# EAGLE board UPS-MAF-APU (EAGLE 9.3.0)

Size 65 x 30 mm. Coordinates in mm from the lower left corner, seen from the top.
Outline: 0,3.5 arc90 3.5,0 61.5,0 arc90 65,3.5 65,26.5 arc90 61.5,30 3.5,30 arc90 0,26.5 0,3.5
Copper layers (1*16): Top 0.035559375mm / dielectric 1.6mm / Bottom 0.035559375mm
Design rules "oshpark-2layer": minimum track width 6mil, minimum drill 10mil, track to track 6mil, track to pad 6mil, pad to pad 6mil, via to via 6mil, smd to smd 6mil, copper to edge 15mil, drill to drill 6mil, minimum pad ring 5mil, minimum via ring 5mil, stop-mask expansion 2.5mil, vias tented up to drill 0mil, thermal gap 10mil
Holes 2.75 mm at 3.5,3.5 61.5,3.5 61.5,26.5 3.5,26.5
bKeepout: area 0.4,0.4 to 6.6,6.6; area 0.4,23.4 to 6.6,29.6; area 58.4,23.4 to 64.6,29.6; area 58.4,0.4 to 64.6,6.6
tRestrict: area 0.4,0.4 to 6.6,6.6; area 0.4,23.4 to 6.6,29.6; area 58.4,23.4 to 64.6,29.6; area 58.4,0.4 to 64.6,6.6

## Footprints (pad centres in the part's own frame; a part is rotated, then mirrored left to right if it is on the bottom)
2X20 = drill 1.016 square: 1 -24.13,-1.27 | drill 1.016 octagon: 2 -24.13,1.27; 3 -21.59,-1.27; 4 -21.59,1.27; 5 -19.05,-1.27; 6 -19.05,1.27; 7 -16.51,-1.27; 8 -16.51,1.27; 9 -13.97,-1.27; 10 -13.97,1.27; 11 -11.43,-1.27; 12 -11.43,1.27; 13 -8.89,-1.27; 14 -8.89,1.27; 15 -6.35,-1.27; 16 -6.35,1.27; 17 -3.81,-1.27; 18 -3.81,1.27; 19 -1.27,-1.27; 20 -1.27,1.27; 21 1.27,-1.27; 22 1.27,1.27; 23 3.81,-1.27; 24 3.81,1.27; 25 6.35,-1.27; 26 6.35,1.27; 27 8.89,-1.27; 28 8.89,1.27; 29 11.43,-1.27; 30 11.43,1.27; 31 13.97,-1.27; 32 13.97,1.27; 33 16.51,-1.27; 34 16.51,1.27; 35 19.05,-1.27; 36 19.05,1.27; 37 21.59,-1.27; 38 21.59,1.27; 39 24.13,-1.27; 40 24.13,1.27
PJ-102AH = drill 1.9 pad 3: 1 4.3,-3; 2 4.3,3; 3 -0.4,0
ESQ-104-XX-X-S = drill 1.016 pad 1.524 square: 1 -3.81,0 | drill 1.016 pad 1.524: 2 -1.27,0; 3 1.27,0; 4 3.81,0
S4B-PH-SM4-TB = smd 1 x 3.5: 1 6,0; 2 4,0; 3 2,0; 4 0,0 | smd 1.6 x 3.5: 5 -2.4,5.7; 6 8.4,5.7
MOLEX_70553-0002 = drill 1.09 pad 1.64 square: 1 2.54,6.095 | drill 1.09 pad 1.64: 2 0,6.095; 3 -2.54,6.095
ESQ-106-XX-X-S = drill 1.016 pad 1.524 square: 1 0,0 | drill 1.016 pad 1.524: 2 2.54,0; 3 5.08,0; 4 7.62,0; 5 10.16,0; 6 12.7,0
WIZNET_RB1-125BAG1A = drill 0.9: L1 6.325,-3.38; L2 3.784,-4.899; L3 -3.786,-3.379; L4 -6.325,-4.9 | drill 0.9 pad 1.3 square: R1 -4.446,6.349 | drill 0.9 pad 1.3: R2 -3.176,8.889; R3 -1.906,6.349; R4 -0.636,8.889; R5 0.634,6.349; R6 1.904,8.889; R7 3.174,6.349; R8 4.444,8.889 | drill 1.6 pad 2.184: S1 -7.876,3.049; S2 7.874,3.049 | hole 3.3: 5.714,-0.001; -5.716,-0.001
SON100P300X300X80-7N = smd 0.85 x 0.45: 1 -1.45,1; 2 -1.45,0; 3 -1.45,-1; 4 1.45,-1; 5 1.45,0; 6 1.45,1 | smd 1.6 x 2.5: 7 0,0
SOP65P640X120-8N = smd 1.475 x 0.45: 1 -2.938,0.975; 2 -2.938,0.325; 3 -2.938,-0.325; 4 -2.938,-0.975; 5 2.938,-0.975; 6 2.938,-0.325; 7 2.938,0.325; 8 2.938,0.975
SOP65P640X120-16N = smd 1.475 x 0.45: 1 -2.938,2.275; 2 -2.938,1.625; 3 -2.938,0.975; 4 -2.938,0.325; 5 -2.938,-0.325; 6 -2.938,-0.975; 7 -2.938,-1.625; 8 -2.938,-2.275; 9 2.938,-2.275; 10 2.938,-1.625; 11 2.938,-0.975; 12 2.938,-0.325; 13 2.938,0.325; 14 2.938,0.975; 15 2.938,1.625; 16 2.938,2.275
SOIC127P600X175-8N = smd 1.525 x 0.7: 1 -2.712,1.905; 2 -2.712,0.635; 3 -2.712,-0.635; 4 -2.712,-1.905; 5 2.712,-1.905; 6 2.712,-0.635; 7 2.712,0.635; 8 2.712,1.905
SOP65P780X200-28N = smd 1.8 x 0.45: 1 -3.55,4.225; 2 -3.55,3.575; 3 -3.55,2.925; 4 -3.55,2.275; 5 -3.55,1.625; 6 -3.55,0.975; 7 -3.55,0.325; 8 -3.55,-0.325; 9 -3.55,-0.975; 10 -3.55,-1.625; 11 -3.55,-2.275; 12 -3.55,-2.925; 13 -3.55,-3.575; 14 -3.55,-4.225; 15 3.55,-4.225; 16 3.55,-3.575; 17 3.55,-2.925; 18 3.55,-2.275; 19 3.55,-1.625; 20 3.55,-0.975; 21 3.55,-0.325; 22 3.55,0.325; 23 3.55,0.975; 24 3.55,1.625; 25 3.55,2.275; 26 3.55,2.925; 27 3.55,3.575; 28 3.55,4.225
OKI-78SR-HORIZONTAL = drill 0.835 pad 1.252: 1 2.5,-6.95; 2 0,-6.95; 3 -2.5,-6.95
ECS250203XENTR = smd 3.5 x 1.2: 1 -2.75,0; 2 2.75,0

## Placement (x,y rotation side)
J1  CONNECTOR_PI_40_PIN  [2X20]  32.5,26.5 0 top
J2  Barrel DC In  [PJ-102AH]  -32,-5 0 top  (outside the outline)
J3  OLED  [ESQ-104-XX-X-S]  50.28,15 270 top
J4  VE.Direct Serial  [S4B-PH-SM4-TB]  -51.5,-38 0 top  (outside the outline)
J5  External DS18B20 Temp  [MOLEX_70553-0002]  -49.5,-23 0 top  (outside the outline)
J6  FTDI Serial Console  [ESQ-106-XX-X-S]  -67.5,-46 0 top  (outside the outline)
J7  MagJack  [WIZNET_RB1-125BAG1A]  -83.5,-65.5 0 top  (outside the outline)
U1  OLED_I2C  [OLED-I2C]  32.5,15 180 top
U2  SI7006-A20-IM  [SON100P300X300X80-7N]  -30,-12.5 0 top  (outside the outline)
U3  HAT EEPROM  [SOP65P640X120-8N]  4,-2.5 0 top
U4  INA260AIPW  [SOP65P640X120-16N]  0,-7.5 0 top  (outside the outline)
U5  Isolator  [SOIC127P600X175-8N]  -32.5,-17.5 0 top  (outside the outline)
U6  ENC28J60_SS  [SOP65P780X200-28N]  -65,-35 0 top  (outside the outline)
U7  5V SMPS  [OKI-78SR-HORIZONTAL]  -11.5,-2 0 top  (outside the outline)
Y1  ECS-250-20-3X-EN-TR  [ECS250203XENTR]  -87.5,-79.5 0 top  (outside the outline)

## Library data of the parts
J1 J3 J5 J6 U1 = APU_ENGR480_UPS_EAGLE_Library
J2 = APU_ENGR480_UPS_EAGLE_Library; DESCRIPTION: DC POWER JACK; HEIGHT: mm; MANUFACTURER_NAME: CUI; MANUFACTURER_PART_NUMBER: PJ-102AH; MOUSER_PART_NUMBER: 490-PJ-102AH; MOUSER_PRICE-STOCK: https://www.mouser.com/Search/Refine.aspx?Keyword=490-PJ-102AH
J4 = APU_ENGR480_UPS_EAGLE_Library; DESCRIPTION: PH SMT side entry shroud header 4 way JST PH Series, 2mm Pitch 4 Way 1 Row Right Angle PCB Header, Solder Termination, 2A; HEIGHT: mm; MANUFACTURER_NAME: JST (JAPAN SOLDERLESS TERMINALS); MANUFACTURER_PART_NUMBER: S4B-PH-SM4-TB(LF)(SN); RS_PART_NUMBER: 6881366P; RS_PRICE-STOCK: http://uk.rs-online.com/web/p/products/6881366P
J7 = APU_ENGR480_UPS_EAGLE_Library; AVAILABILITY: Good; DESCRIPTION: Accessory RJ-45 With Transformer Connector - UDE; MF: WIZnet; MP: RB1-125BAG1A; PACKAGE: None; PRICE: 2.18 USD
U2 = APU_ENGR480_UPS_EAGLE_Library; DESCRIPTION: Silicon Labs Si7006-A20-IM Temperature & Humidity Sensor 6-Pin DFN, -40 +125 C; HEIGHT: 0.8mm; MANUFACTURER_NAME: Silicon Labs; MANUFACTURER_PART_NUMBER: Si7006-A20-IM; MOUSER_PART_NUMBER: 634-SI7006-A20-IM; MOUSER_PRICE-STOCK: https://www.mouser.com/Search/Refine.aspx?Keyword=634-SI7006-A20-IM; RS_PART_NUMBER: 8652274P; RS_PRICE-STOCK: http://uk.rs-online.com/web/p/products/8652274P
U3 = APU_ENGR480_UPS_EAGLE_Library; DESCRIPTION: STMICROELECTRONICS - M24C32-RDW6TP - EEPROM, 32KBIT, I2C, 1MHZ, TSSOP-8; HEIGHT: 1.2mm; MANUFACTURER_NAME: STMicroelectronics; MANUFACTURER_PART_NUMBER: M24C32-RDW6TP; MOUSER_PART_NUMBER: 511-M24C32-RDW6TP; MOUSER_PRICE-STOCK: https://www.mouser.com/Search/Refine.aspx?Keyword=511-M24C32-RDW6TP
U4 = APU_ENGR480_UPS_EAGLE_Library; DESCRIPTION: 36V, Bi-Dir, High Accuracy, Low-/High-Side, I2C Current/Pwr Monitor w/Integrated 2m Shunt Resistor; HEIGHT: 1.2mm; MANUFACTURER_NAME: Texas Instruments; MANUFACTURER_PART_NUMBER: INA260AIPW; MOUSER_PART_NUMBER: 595-INA260AIPW; MOUSER_PRICE-STOCK: https://www.mouser.com/Search/Refine.aspx?Keyword=595-INA260AIPW
U5 = APU_ENGR480_UPS_EAGLE_Library; DESCRIPTION: Digital Isolators 2.5 kV 1 forward & 1 reverse 2-channel isolator; HEIGHT: 1.75mm; MANUFACTURER_NAME: Silicon Labs; MANUFACTURER_PART_NUMBER: Si8621AB-B-ISR; MOUSER_PART_NUMBER: 634-SI8621AB-B-ISR; MOUSER_PRICE-STOCK: https://www.mouser.com/Search/Refine.aspx?Keyword=634-SI8621AB-B-ISR
U6 = APU_ENGR480_UPS_EAGLE_Library; ALLIED_NUMBER: 70046819; ALLIED_PRICE-STOCK: http://www.alliedelec.com/microchip-technology-inc-enc28j60-ss/70046819/; DESCRIPTION: Ethernet ICs 8 KB RAM MAC&PHY Ethernet Controller; HEIGHT: 2mm; MANUFACTURER_NAME: Microchip; MANUFACTURER_PART_NUMBER: ENC28J60/SS; MOUSER_PART_NUMBER: 579-ENC28J60/SS; MOUSER_PRICE-STOCK: https://www.mouser.com/Search/Refine.aspx?Keyword=579-ENC28J60%2FSS; RS_PART_NUMBER: 6665713P; RS_PRICE-STOCK: http://uk.rs-online.com/web/p/products/6665713P
U7 = APU_ENGR480_UPS_EAGLE_Library; DESCRIPTION: Switching Regulator 7-36Vin 5Vo 1.5A Non-Isolated DC-DC Converter, 5V dc Output, 1.5A; HEIGHT: mm; MANUFACTURER_NAME: Murata Electronics; MANUFACTURER_PART_NUMBER: OKI-78SR-5/1.5-W36H-C; MOUSER_PART_NUMBER: 580-OKI78SR51.5W36HC; MOUSER_PRICE-STOCK: https://www.mouser.com/Search/Refine.aspx?Keyword=580-OKI78SR51.5W36HC; RS_PART_NUMBER: 1736931; RS_PRICE-STOCK: http://uk.rs-online.com/web/p/products/1736931
Y1 = ECS-250-20-3X-EN-TR; DESCRIPTION: CRYSTAL 25.0000MHZ 20PF SMD; HEIGHT: 2.3mm; MANUFACTURER_NAME: ECS Inc.; MANUFACTURER_PART_NUMBER: ECS-250-20-3X-EN-TR

## Nets
3.3V: J1.1 J3.2 J5.3 J6.3 U4.5 U4.10 U6.19 U6.20 U6.25 U6.28
BATTERY+: U4.12 U4.14 U4.15 U4.16
BATTERY-: U4.1 U4.2 U4.3
CS: J1.24
GND: J1.39 J3.1 J5.1 J6.1 J7.S1 J7.S2 U2.2 U4.4 U4.6 U4.11 U6.2 U6.18 U6.21 U6.22 U7.2
MISO: J1.21 U6.6
MOSI: J1.19 U6.7
N$1: J1.8 J6.4
N$2: J1.10 J6.5
N$3: U6.13
N$4: J1.7 J5.2
N$5: U6.12
N$6: J7.R2 U6.16
N$7: J7.R1 U6.17
PAD: U2.7
SCK: J1.5 J3.3 U2.6 U4.9
SCLK: J1.23 U6.8
SDA: J1.3 J3.4 U2.1 U4.8
VDD: U2.5
VDDTX: U6.15
VSSRX: U6.11

## Tracks (layer width: path | path; a pad name or v marks a point on that pad's centre or on a via)
3.3V  (9 unrouted)
BATTERY+  (3 unrouted)
BATTERY-  (2 unrouted)
GND  (14 unrouted)
MISO  (1 unrouted)
MOSI  (1 unrouted)
N$1  (1 unrouted)
N$2  (1 unrouted)
N$4  (1 unrouted)
N$6  (1 unrouted)
N$7  (1 unrouted)
SCK  (3 unrouted)
SCLK  (1 unrouted)
SDA  (3 unrouted)

## Text on the board
Top: Top
Bottom: Bottom
bPlace: APU MAF UPS 2019 / 2/25/19